# Altium PCB ICM20602.PcbDoc
Units mm, origin at the board's own origin, x right, y up, seen from the top; angles counter-clockwise.
Board outline 45.34 x 49.28 mm, 2 copper layers (Top Layer, Bottom Layer); 22 components, 13 nets, 98 pads, 36 vias.
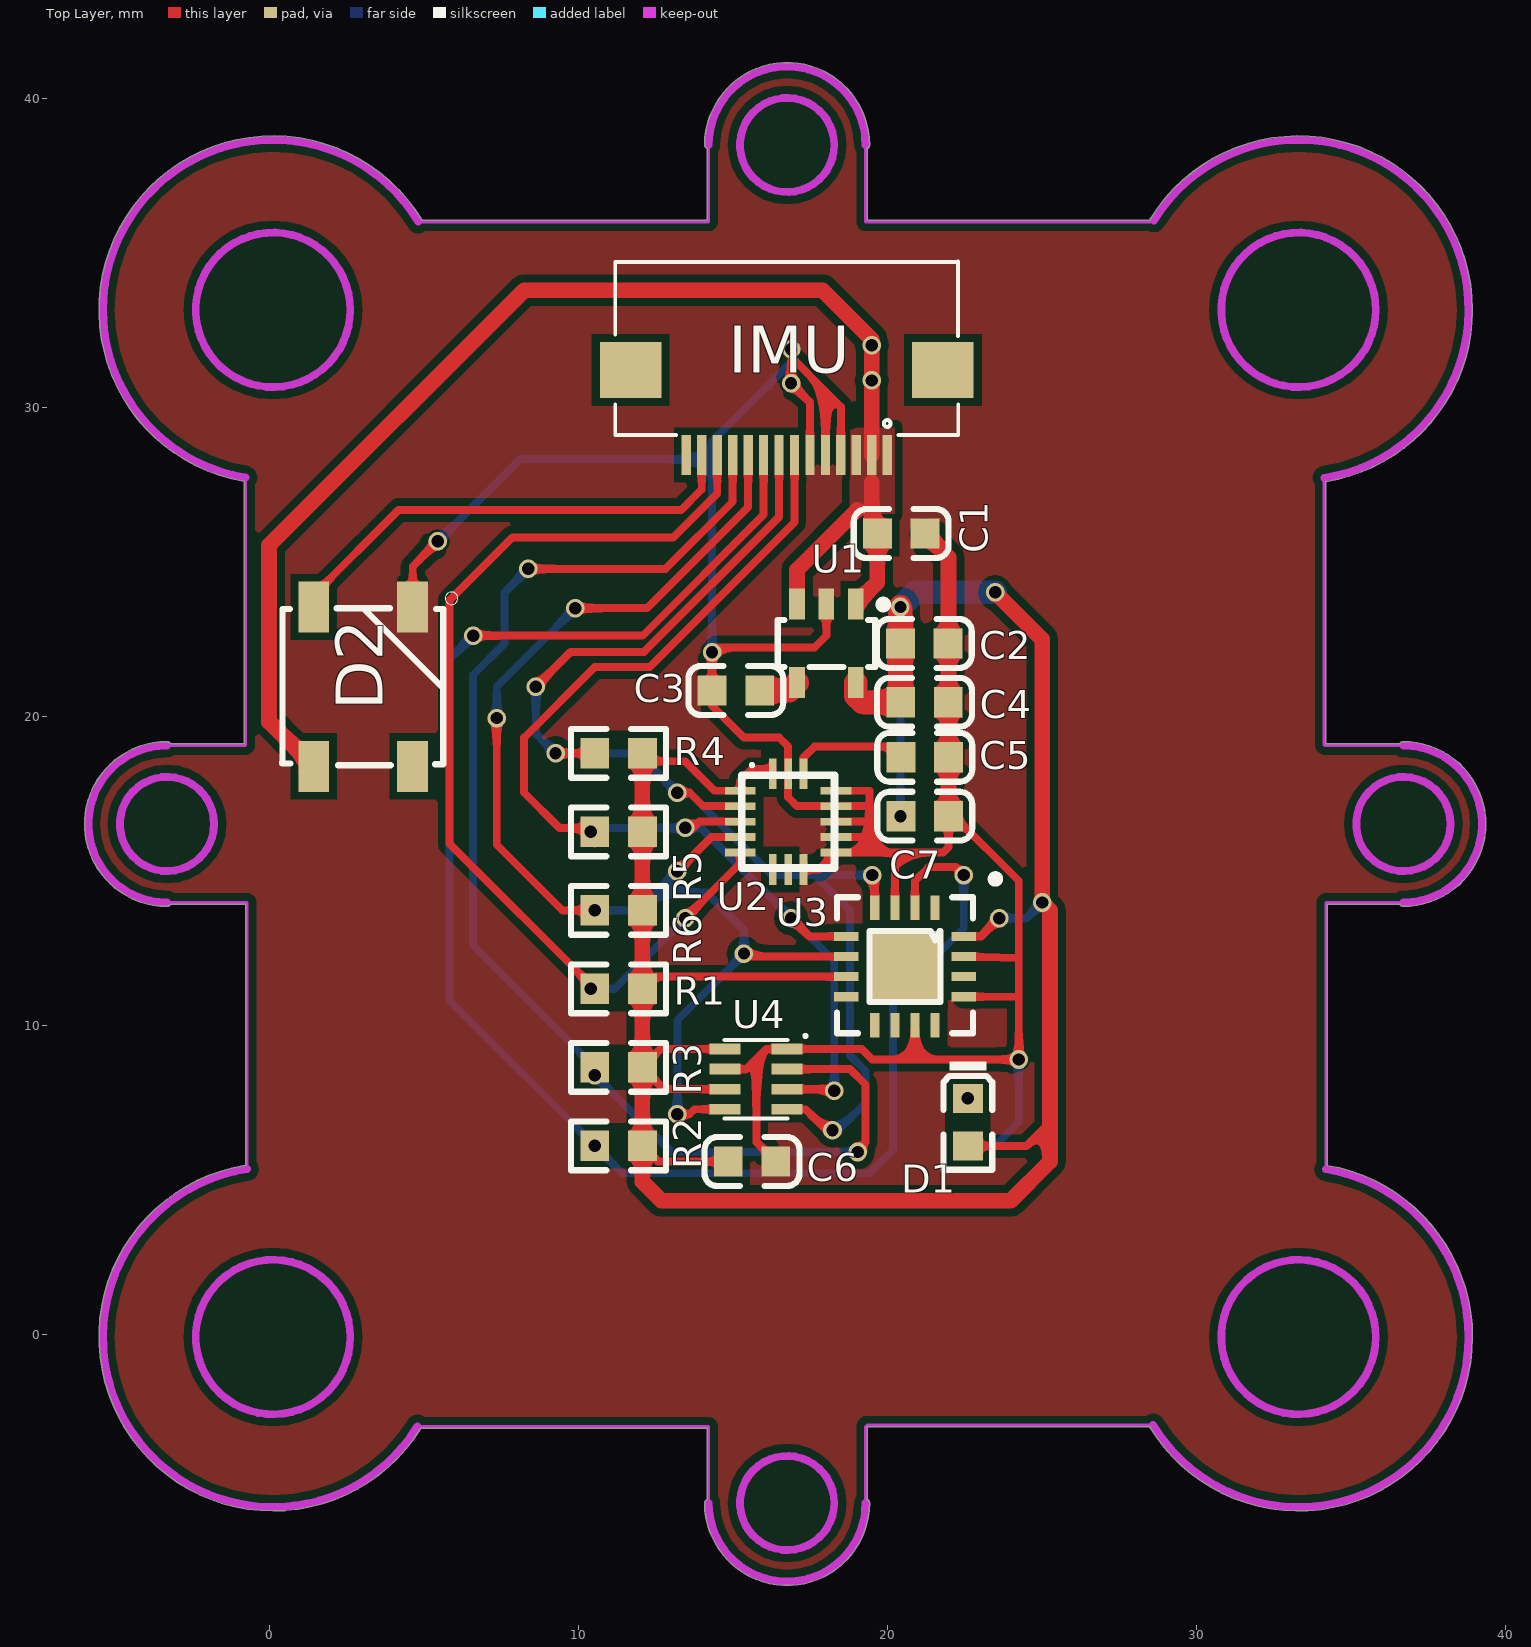
[diagram p0: Top Layer view]
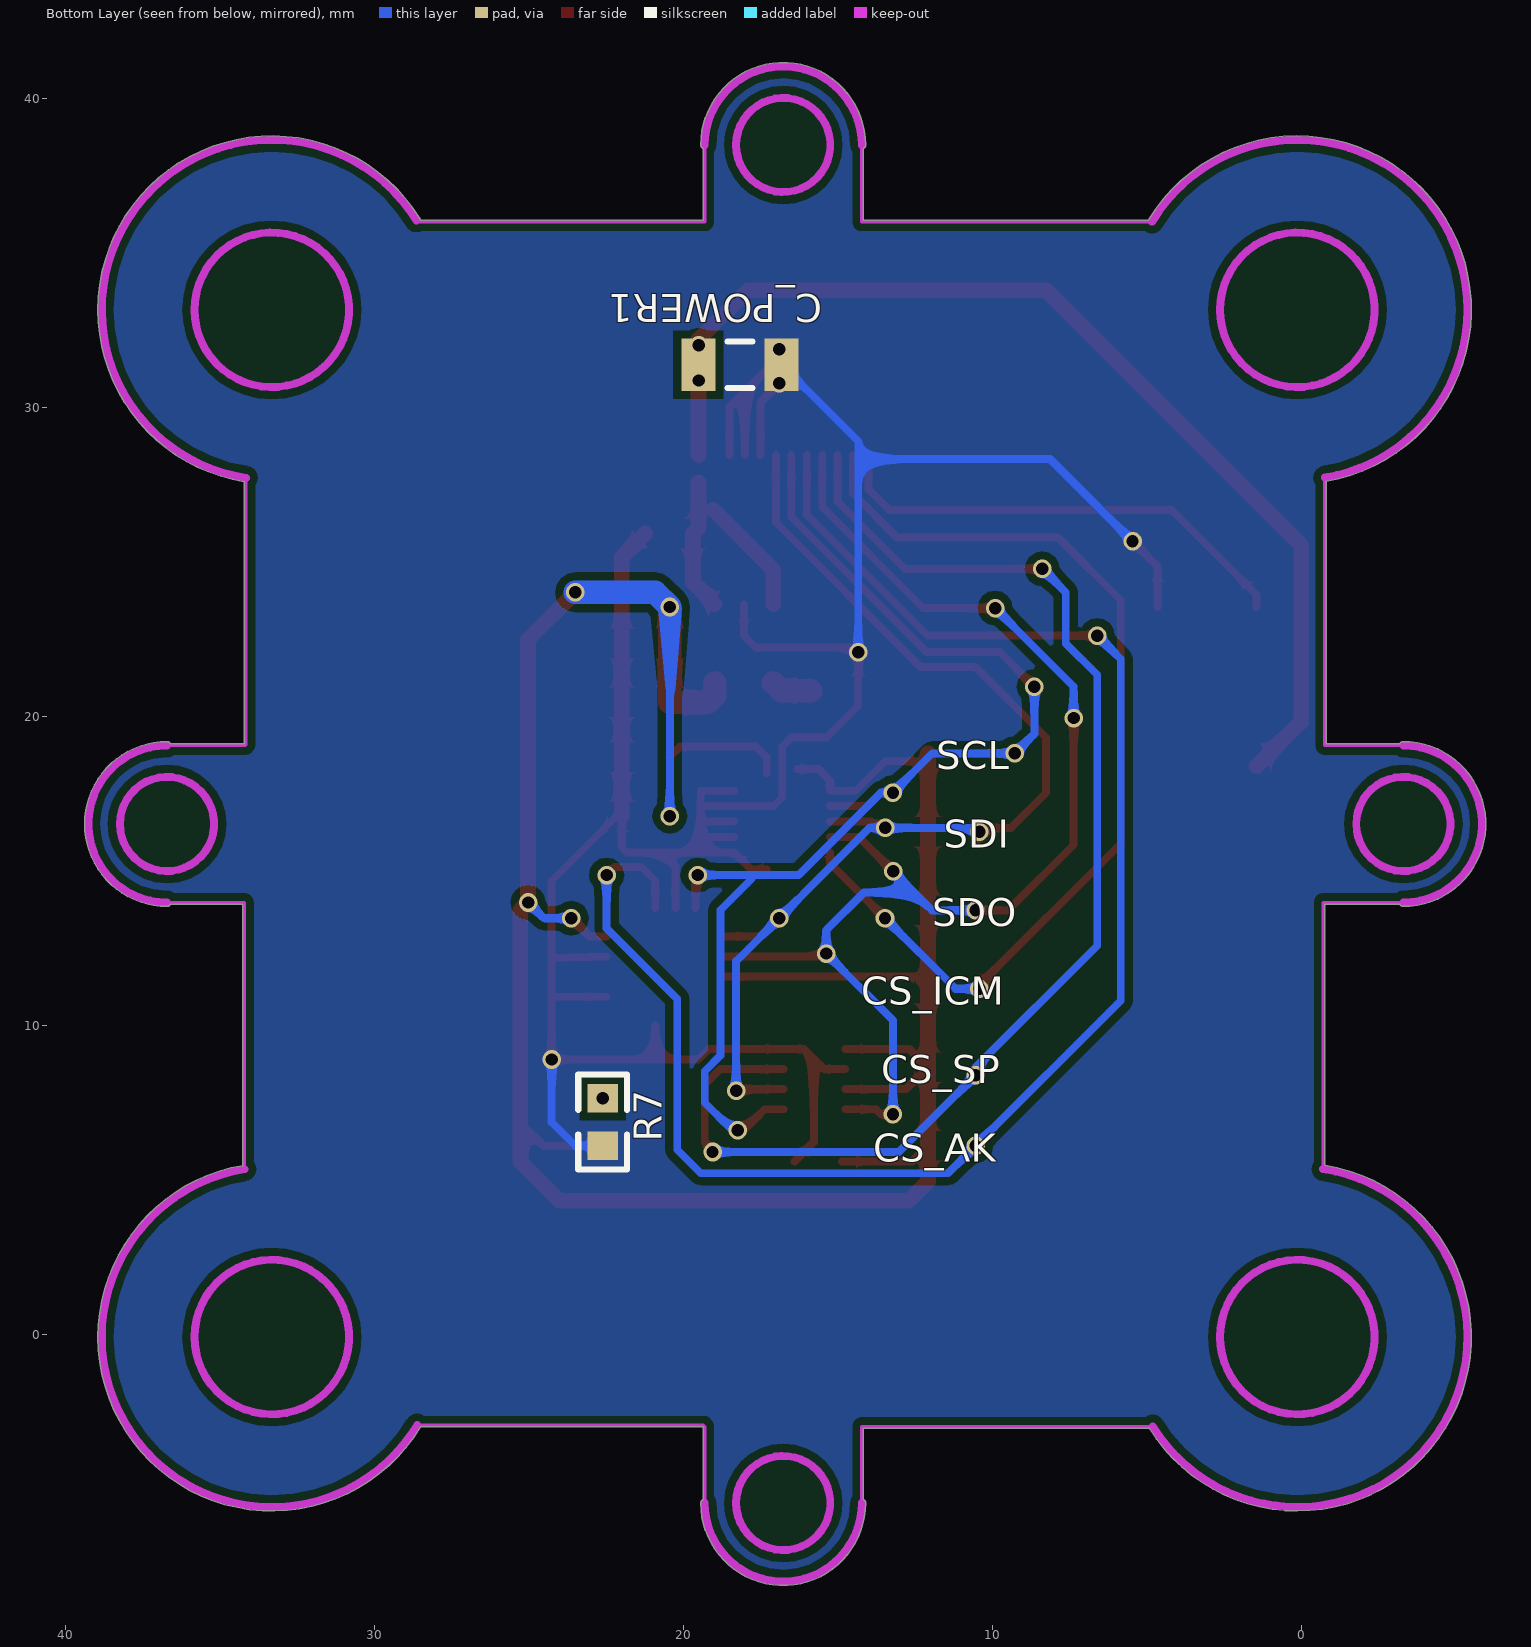
[diagram p1: Bottom Layer view, seen from below]
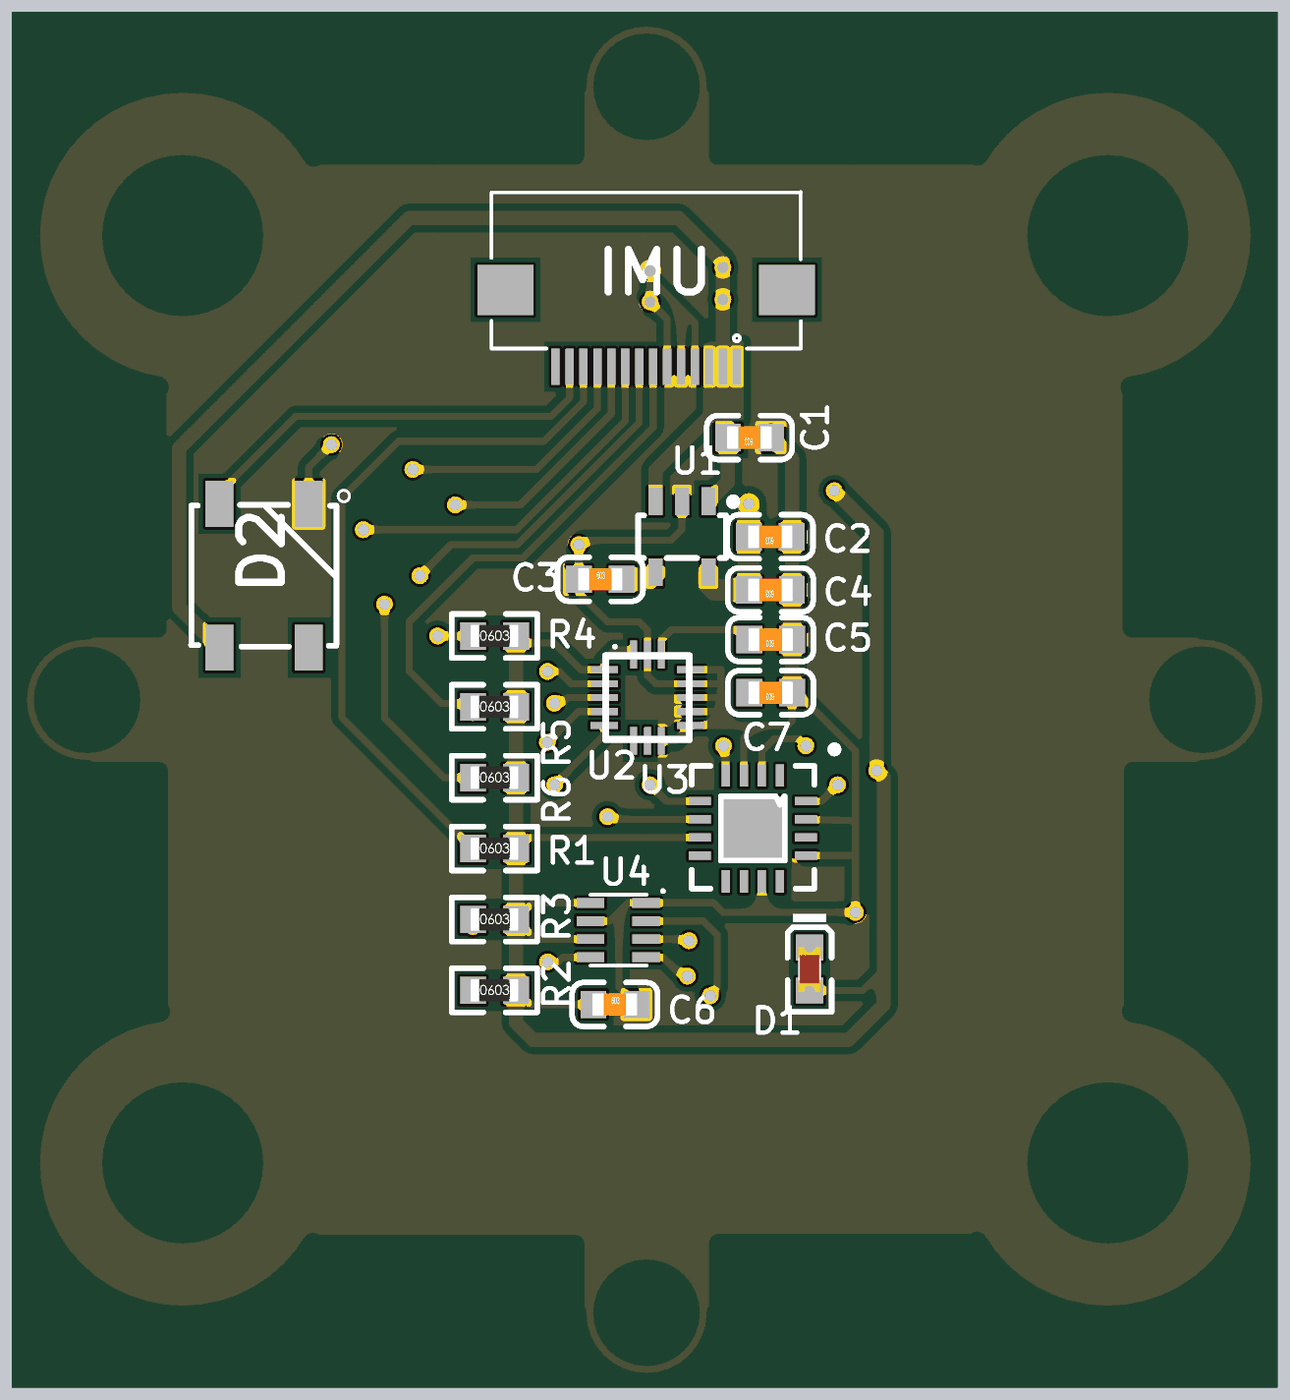
[diagram p2: 3D render of the assembled board from above, using the file's embedded part models]

## Layer stack, top to bottom
Top Solder: solder mask 0.0102, Solder Resist, Dk 3.5
Top Layer: signal copper 0.0356
Dielectric 1: dielectric 0.32, FR-4, Dk 4.8
Bottom Layer: signal copper 0.0356
Bottom Solder: solder mask 0.0102, Solder Resist, Dk 3.5

## Board outline
-0.759,5.467 ccw(c0.127,-0.09) 4.913,-3.05 ccw(c4.805,-2.983) 4.921,-3.034 14.173,-3.034 14.173,-5.344 ccw(c14.224,-5.461) 14.097,-5.461 ccw(c16.764,-5.461) 19.431,-5.461 ccw(c19.304,-5.461) 19.355,-5.344 19.355,-2.992 28.491,-2.992 ccw(c28.607,-2.941) 28.498,-3.007 ccw(c33.311,-0.09) 38.938,-0.09 ccw(c33.311,-0.09) 34.246,5.459 34.246,13.919 36.586,13.919 ccw(c36.703,13.97) 36.703,13.843 ccw(c36.703,16.51) 39.37,16.51 ccw(c36.703,16.51) 36.703,19.177 ccw(c36.703,19.05) 36.586,19.101 34.197,19.101 34.197,27.59 ccw(c33.311,33.147) 38.938,33.147 ccw(c33.311,33.147) 28.525,36.107 ccw(c28.633,36.04) 28.506,36.049 19.355,36.049 19.355,38.364 ccw(c19.304,38.481) 19.431,38.481 ccw(c16.764,38.481) 14.097,38.481 ccw(c14.224,38.481) 14.173,38.364 14.173,36.049 4.947,36.049 ccw(c4.831,35.998) 4.94,36.064 ccw(c0.127,33.147) -0.808,27.598 -0.808,19.101 -3.185,19.101 ccw(c-3.302,19.05) -3.302,19.177 ccw(c-3.302,16.51) -3.302,13.843 ccw(c-3.302,13.97) -3.185,13.919 -0.759,13.919

## Design rules (kind name [scope] priority, off if disabled: settings)
Clearance [All] p1: gap=0.254 ignorepadtopadclearanceinfootprint=TRUE
MinimumSolderMaskSliver [All] p1: minsoldermaskwidth=0
PolygonConnect [All] p1: connectstyle=Direct reliefconductorwidth=0.254 reliefentries=4 polygonreliefangle="90 Angle" airgapwidth=0.254
RoutingVias [All] p1: holewidth=0.4 width=0.6 viastyle="Through Hole" minholewidth=0.4 minwidth=0.6 maxholewidth=2.54 maxwidth=2.54
SilkToSilkClearance [All] p1: silktosilkclearance=0
SilkToSolderMaskClearance [IsPad] p1: minsilkscreentomaskgap=0 clearancetoexposedcopper=TRUE
SolderMaskExpansion [All] p1: expansion=0.102
UnRoutedNet [All] p1: checkbadconnections=TRUE
Width [All] p1: maxlimit=1.27 minlimit=0.152 preferedwidth=0.254
26 further rules are at their usual default settings.

## Classes and differential pairs
component class ICM20602: IMU

## Components (designator, comment, footprint, x,y, rotation, side; value= is the part's Value field where it differs from the comment)
C1 "100nF" 0603_C 20.455,25.908 r180 top
C2 "10uF" 0603_C 21.201,22.352 r180 top
C3 "100nF" 0603_C 15.105,20.828 r0 top
C4 "100nF" 0603_C 21.209,20.447 r180 top
C5 "100nF" 0603_C 21.217,18.669 r180 top
C6 "100nF" 0603_C 15.629,5.588 r0 top
C7 "100nF" 0603_C 21.217,16.764 r180 top
C_POWER1 "100uf" C1206 18.161,31.369 r180 bottom value=10uf
D1 "红灯 0603" 0603_LED_S1 22.614,6.858 r270 top
D2 "WS2812B" WS2812B 3.048,20.955 r270 top
IMU "FPC-0.5-14" FPC-0.5-14 16.752,28.448 r180 top
R1 "1KΩ" 0603_R 11.311,11.176 r0 top
R2 "1KΩ" 0603_R 11.311,6.096 r0 top
R3 "1KΩ" 0603_R 11.311,8.636 r0 top
R4 "1KΩ" 0603_R 11.311,18.796 r0 top
R5 "1KΩ" 0603_R 11.311,16.256 r0 top
R6 "1KΩ" 0603_R 11.311,13.716 r0 top
R7 "1KΩ" 0603_R 22.606,6.866 r90 bottom
U1 "XC6204-30" SOT23-5S 18.984,23.622 r270 top
U2 "ICM20602" ICM20602 15.248,15.113 r0 top
U3 "AK8975" AK8975 18.677,10.922 r0 top
U4 "SPL06" LGA-2_5X2MM 15.756,8.255 r0 top

## Footprints (in the part's own frame and the unit in brackets; to place one, negate y for a bottom-side part, rotate by r counter-clockwise, add the part's x,y. Pads: shape width x height; smd on the part's side, far side on the other; paste and mask are expansions set on the pad)
0603_C [mm]
  rect 0.93x0.98 smd: 1(-0.77,0) 2(0.77,0)
  silkscreen extent -1.53,-0.79 1.54,0.79, body extent -0.8,-0.4 0.8,0.4, height 0.3
0603_LED_S1 [mm]
  rect 0.93x0.98 smd: A(0.77,0) K(-0.77,0)
  silkscreen extent -1.98,-0.79 1.54,0.79, body extent -0.8,-0.4 0.8,0.4, height 0.6
0603_R [mm]
  rect 0.93x0.98 smd: 1(-0.77,0) 2(0.77,0)
  silkscreen extent -1.53,-0.79 1.54,0.79, body extent -0.85,-0.4 0.85,0.4, height 0.56
AK8975 [mil] "QFN, 16-Leads, Body 4.00x4.00mm, Pitch 0.65mm, Thermal Pad 2.60x2.60mm, IPC Medium Density"
  rect 11.81x31.5 smd: 1(113.19,113.19) 2(87.6,113.19) 3(62,113.19) 4(36.41,113.19) 9(36.41,-36.41) 10(62,-36.41) 11(87.6,-36.41) 12(113.19,-36.41)
  rect 31.5x11.81 smd: 5(0,76.78) 6(0,51.19) 7(0,25.59) 8(0,0) 13(149.6,0) 14(149.6,25.59) 15(149.6,51.19) 16(149.6,76.78)
  rect 90.55x90.55 smd: 17(74.8,38.39)
  silkscreen extent -12,-47 195,155, body extent -6,-41 156,120, height 30
C1206 [mm]
  rect 1.1x1.7 smd: 1(-1.35,0) 2(1.35,0)
  silkscreen extent -0.4,-0.75 0.4,0.75, body extent -1.7,-0.9 1.7,0.9, height 1.3
FPC-0.5-14 [mm]
  rect 0.3x1.3 smd: 1(-3.25,0) 2(-2.75,0) 3(-2.25,0) 4(-1.75,0) 5(-1.25,0) 6(-0.75,0) 7(-0.25,0) 8(0.25,0) 9(0.75,0) 10(1.25,0) 11(1.75,0) 12(2.25,0) 13(2.75,0) 14(3.25,0)
  rect 2x1.8 smd: Z1(-5.05,-2.75) Z2(5.05,-2.75)
  silkscreen extent -5.55,-6.26 5.55,-0.65
ICM20602 [mm]
  rect 1x0.25 smd: 1(-0.001,2.474) 2(-0.001,1.974) 3(-0.001,1.474) 4(-0.001,0.974) 5(-0.001,0.474) 9(3.099,0.474) 10(3.099,0.974) 11(3.099,1.474) 12(3.099,1.974) 13(3.099,2.474)
  rect 0.25x1 smd: 6(1.049,-0.076) 7(1.549,-0.076) 8(2.049,-0.076) 14(2.049,3.024) 15(1.549,3.024) 16(1.049,3.024)
  silkscreen extent 0.05,-0.03 3.05,3.35
LGA-2_5X2MM [mm]
  rect 1x0.35 smd: 1(1.001,0.975) 2(1.001,0.325) 3(1.001,-0.325) 4(1.001,-0.975) 5(-1.001,-0.975) 6(-1.001,-0.325) 7(-1.001,0.325) 8(-1.001,0.975)
  silkscreen extent -1.02,-1.27 1.65,1.45, body extent -1.09,-1.35 1.09,1.31, height 0.9
SOT23-5S [mm]
  rect 1x0.508 smd: 1(0,0) 2(0,-0.95) 3(0,-1.9) 4(2.54,-1.9) 5(2.54,0)
  silkscreen extent 0,-2.52 2.03,0.89
WS2812B [mm]
  rect 1.651x1 smd: 1(2.577,-1.6) 2(2.577,1.6) 3(-2.577,1.6) 4(-2.577,-1.6)
  silkscreen extent -3.06,-2.62 2.54,3.06

## Part data
C1 C3 C4 C5 C6 C7: library part "0603 100nF (104) 10% 50V", "贴片电容", Package=0603, SuppliersPartNumber=C14663, ComponentLink1Description=供应商, ComponentLink1URL=http://www.szlcsc.com/product/details_15331.html, Supplier=LC
C2: library part "0603 10uF (106) 10% 10V", "贴片电容", Package=0603, SuppliersPartNumber=C19702, ComponentLink1Description=供应商, ComponentLink1URL=http://www.szlcsc.com/product/details_20411.html, Supplier=LC
C_POWER1: library part "Cap Pol3", "Polarized Capacitor (Surface Mount)", LatestRevisionDate=17-Jul-2002, LatestRevisionNote="Re-released for DXP Platform.", PackageReference=C0805, Published=8-Jun-2000, Publisher="Altium Limited"
D1: library part "0603 红灯", "发光二极管", Package=0603, SuppliersPartNumber=C2286, ComponentLink1Description=供应商, ComponentLink1URL=http://www.szlcsc.com/product/details_2659.html, Supplier=LC
D2: "Intelligent Control Led Integrated Light Source Pack Of 10", Package=None, Availability=Unavailable, MF="Seeed Technology", MP=WS2812B, Price=None, SnapEDA_Link=https://www.snapeda.com/parts/WS2812B/Seeed%20Technology%20Co.%2C%20Ltd/view-part/?ref=snap
IMU: "FFC / FPC Board Connector, WR-FPC Series, Surface Mount, Receptacle, 14, Bottom, 0.5 mm", Package=None, Availability=Unavailable, MF="Wurth Electronics", MP=687114149022, Price=None, SnapEDA_Link=https://www.snapeda.com/parts/687114149022/Wurth%20Electronics%20Inc./view-part/?ref=snap
R1 R2 R3 R4 R5 R6 R7: library part "0603 1KΩ (1001) 1%", "贴片电阻", Package=0603, SuppliersPartNumber=C21190, ComponentLink1Description=供应商, ComponentLink1URL=http://www.szlcsc.com/product/details_21904.html, Supplier=LC
U1: library part XC6204

## Via types
v1: diameter 0.6, hole 0.4, Top Layer to Bottom Layer, 36 vias

## Nets (pads, with @x,y where several pads share a name; then routed paths per layer and width w, separated by ;. In a path a pad name is that pad's centre, name@x,y a point inside that pad or via, vN(x,y) a via of type N, cw(c..) or ccw(c..) an arc to the next point about the centre after c; other vN are vias at no path point)
3V3: C2.2 C4.2 C6.1 C7.2 D1.A R1.2 R2.2 R3.2 R4.2 R5.2 R6.2 U1.5 U2.1 U2.16 U3.7 U3.16 U4.6 U4.8 | length 89
  Top Layer w0.254: R2.2 12.589,5.588 C6.1 ; R1.2 12.477,11.572 U3.7 ; R4.2 12.335,18.542 13.462,18.542 14.417,17.587 U2.1 15.247,17.914 15.621,18.288 U2.16@16.297,18.288 ; U4.6 12.787,7.93 R3.2 12.675,9.23 U4.8 ; U3.16 23.032,12.872 v1(23.622,13.462) ; D1.A 24.503,6.088 25.273,6.858
  Top Layer w0.508: R4.2 R5.2 R6.2 R1.2 R3.2 R2.2 12.081,4.937 12.7,4.318 24.003,4.318 25.273,5.588 25.273,6.858 25.273,13.716 v1(25.019,13.97) 25.019,22.479 v1(23.495,24.003) v1@23.495,23.927
  Top Layer w0.762: U1.5 18.984,20.656 19.193,20.447 C4.2 20.431,20.455 C2.2 v1(20.431,23.532)
  Bottom Layer w0.254: v1(20.431,16.764) v1(20.431,23.532) ; v1(23.622,13.462) 24.511,13.462 v1(25.019,13.97)
  Bottom Layer w0.762: v1(20.431,23.532) 20.902,24.003 v1(23.495,24.003)
CS_AK: IMU.9 R2.1 U3.2 | length 54.6
  Top Layer w0.254: v1(6.604,22.606) 12.088,22.606 16.002,26.52 IMU.9 ; U3.2 20.902,14.671 21.344,15.113 22.225,15.113 v1(22.479,14.859)
  Bottom Layer w0.254: v1(6.604,22.606) 5.842,21.844 5.842,10.795 v1(10.541,6.096) 11.43,5.207 19.431,5.207 20.193,5.969 20.193,10.848 22.479,13.134 v1(22.479,14.859)
CS_ICM: IMU.12 R1.1 U2.5 | length 32.7
  Top Layer w0.254: R1.1 5.842,15.875 5.842,23.749 7.874,25.781 13.081,25.781 14.502,27.202 IMU.12 ; v1(13.47,13.462) 15.247,15.239 U2.5
  Bottom Layer w0.254: v1(10.414,11.176) 11.184,11.176 v1(13.47,13.462)
CS_SP: IMU.11 R3.1 U4.2 | length 42.5
  Top Layer w0.254: v1(8.382,24.765) 12.827,24.765 15.002,26.94 IMU.11 ; v1(10.541,8.382) R3.1 ; U4.2 18.796,8.58 19.304,8.072 19.304,6.223 v1@19.05,5.969
  Bottom Layer w0.254: v1(8.382,24.765) 7.62,24.003 7.62,22.352 6.604,21.336 6.604,12.573 10.541,8.636 v1(10.541,8.382) 13.025,5.898 v1(19.05,5.898)
GND: C1.1 C2.1 C3.1 C4.1 C5.1 C6.2 C7.1 C_POWER1.2 D2.3 IMU.4 IMU.5 IMU.6 R7.1 U1.2 U2.8 U2.9 U2.10 U2.11 U2.12 U2.13 U2.15 U3.3 U3.11 U3.13 U3.15 U4.1 U4.7 | length 99.4
  Top Layer w0.254: D2.3 4.648,24.841 v1(5.461,25.654) ; U4.7 15.446,8.58 15.771,8.905 ; C6.2 15.771,6.216 15.771,8.905 ; 16.891,31.496 v1(16.891,30.768) 17.502,30.157 IMU.6 ; 16.954,31.559 18.002,30.512 ; U2.8 17.797,15.037 U2.9 19.431,15.587 ; IMU.5 18.002,30.512 ; U1.2 18.034,22.606 17.653,22.225 14.487,22.225 v1(14.335,22.073) C3.1 14.335,20.336 15.367,19.304 16.51,19.304 16.797,19.017 U2.15 16.797,17.374 17.084,17.087 U2.12 19.304,17.087 ; U2.10 19.346,16.087 19.346,16.129 ; U2.11 19.304,16.587 ; U2.13 19.431,17.587 19.431,15.587 ; IMU.4 18.502,30.012 18.002,30.512 ; U3.3 20.252,15.13 20.709,15.587 ; U3.11 20.902,8.89 ; U3.13 24.257,10.922 ; U3.15 24.257,12.174 ; 15.771,8.905 16.096,9.23 U4.1 19.177,9.23 19.517,8.89 20.902,8.89 ; 19.431,15.587 20.709,15.587 ; 20.709,15.587 21.818,15.587 21.987,15.756 C7.1 22.163,16.764 24.257,14.67 24.257,10.922 ; 20.902,8.89 24.242,8.89 24.257,8.905 24.257,10.922
  Top Layer w0.508: C1.1 21.987,25.146 C5.1 C7.1
  Bottom Layer w0.254: v1(5.461,25.654) 8.128,28.321 14.335,28.321 ; v1(14.335,22.073) 14.335,28.321 ; C_POWER1.2 14.335,28.893 14.335,28.321 ; R7.1 23.495,6.096 24.257,6.858 v1(24.257,8.89)
  other v1: 16.891,31.877
NetC3_2: C3.2 U1.4 | length 1.3
  Top Layer w0.762: C3.2 16.83,20.828 U1.4
NetC5_2: C5.2 U2.14 | length 4
  Top Layer w0.254: U2.14 17.297,18.66 17.654,19.017 20.099,19.017 C5.2
NetD1_K: D1.K R7.2
  other v1: 22.606,7.636
RGB: D2.4 IMU.13 | length 15.5
  Top Layer w0.254: D2.4 1.448,23.927 4.191,26.67 13.335,26.67 14.002,27.337 IMU.13
SCL: IMU.8 R4.1 U2.2 U3.4 U4.4 | length 42.4
  Top Layer w0.254: v1(8.636,20.955) 9.754,22.073 12.129,22.073 16.502,26.445 IMU.8 ; v1@9.144,18.923 v1(9.271,18.796) R4.1 ; v1(13.212,17.526) 13.613,17.526 14.052,17.087 U2.2 ; U4.4 17.358,7.28 18.034,6.604 v1(18.232,6.604) ; U3.4 v1@19.602,14.696
  Bottom Layer w0.254: v1(8.636,20.955) 8.636,19.431 v1(9.271,18.796) 11.938,18.796 v1@13.212,17.522 ; v1(13.212,17.526) 13.597,17.526 16.264,14.859 17.78,14.859 ; v1(18.232,6.604) 18.415,6.604 19.304,7.493 19.304,8.509 18.796,9.017 18.796,13.724 17.78,14.74 17.78,14.859 ; v1@19.602,14.696 19.439,14.859 17.78,14.859
  other v1: 19.524,14.859
SDI: IMU.7 R5.1 U2.3 U3.5 U4.3 | length 38.1
  Top Layer w0.254: R5.1@10.541,15.875 R5.1 10.414,16.383 9.398,16.383 8.255,17.526 8.255,19.304 10.541,21.59 12.319,21.59 17.002,26.273 IMU.7 ; v1@13.502,16.383 13.724,16.383 13.928,16.587 U2.3 ; U4.3 18.232,7.93 v1(18.288,7.874) ; v1(16.891,13.462) 17.481,12.872 U3.5
  Bottom Layer w0.254: v1(10.414,16.256) 10.541,16.383 v1(13.462,16.383) 13.978,16.383 18.288,12.073 v1(18.288,7.874)
SDO: IMU.10 R6.1 U2.4 U3.6 U4.5 | length 42.2
  Top Layer w0.254: v1(7.366,19.939) 7.366,15.841 9.491,13.716 v1(10.541,13.716) ; v1(9.906,23.495) 12.232,23.495 15.502,26.765 IMU.10 ; v1(13.212,7.117) 13.602,7.117 13.765,7.28 U4.5 ; v1@13.212,14.982 14.317,16.087 U2.4 ; v1(15.367,12.319) 15.464,12.222 U3.6
  Bottom Layer w0.254: v1(7.366,19.939) 7.366,20.955 v1(9.906,23.495) ; v1(10.541,13.716) 11.946,13.716 12.525,14.295 ; v1(13.212,7.117) 13.212,10.156 15.367,12.311 v1(15.367,12.319) 15.367,13.081 14.153,14.295 12.525,14.295 ; v1@13.212,14.982 12.525,14.295
  other v1: 13.208,14.986
VCC: C1.2 C_POWER1.1 D2.1 IMU.1 IMU.2 IMU.3 U1.1 U1.3 | length 43.2
  Top Layer w0.508: D2.1 0.007,19.819 0,19.812 0,25.527 8.255,33.782 17.907,33.782 19.502,32.187 19.502,31.877 IMU.2 ; U1.3 17.084,24.731 19.023,26.67 ; U1.1 19.685,24.323 C1.2 19.502,26.091 19.502,27.559
  other v1: 19.502,30.861 19.502,32.004
pads on no net: D2.2 IMU.14 IMU.Z1 IMU.Z2 U2.6 U2.7 U3.1 U3.8 U3.9 U3.10 U3.12 U3.14 U3.17

## Polygon pours and split planes (outlines as drawn)
GND on Top Layer "GND_L01_P005" (solid, remove dead copper, pour order 5): -0.759,5.467 ccw(c0.127,-0.09) 4.913,-3.05 ccw(c4.805,-2.983) 4.921,-3.034 14.173,-3.034 14.173,-5.344 ccw(c14.224,-5.461) 14.097,-5.461 ccw(c16.764,-5.461) 19.431,-5.461 ccw(c19.304,-5.461) 19.355,-5.344 19.355,-2.992 28.491,-2.992 ccw(c28.607,-2.941) 28.498,-3.007 ccw(c33.311,-0.09) 38.938,-0.09 ccw(c33.311,-0.09) 34.246,5.459 34.246,13.919 36.586,13.919 ccw(c36.703,13.97) 36.703,13.843 ccw(c36.703,16.51) 39.37,16.51 ccw(c36.703,16.51) 36.703,19.177 ccw(c36.703,19.05) 36.586,19.101 34.197,19.101 34.197,27.59 ccw(c33.311,33.147) 38.938,33.147 ccw(c33.311,33.147) 28.525,36.107 ccw(c28.633,36.04) 28.506,36.049 19.355,36.049 19.355,38.364 ccw(c19.304,38.481) 19.431,38.481 ccw(c16.764,38.481) 14.097,38.481 ccw(c14.224,38.481) 14.173,38.364 14.173,36.049 4.947,36.049 ccw(c4.831,35.998) 4.94,36.064 ccw(c0.127,33.147) -0.808,27.598 -0.808,19.101 -3.185,19.101 ccw(c-3.302,19.05) -3.302,19.177 ccw(c-3.302,16.51) -3.302,13.843 ccw(c-3.302,13.97) -3.185,13.919 -0.759,13.919
VCC on Top Layer "VCC_L01_P000" (solid, remove dead copper, pour order 0): 18.796,29.337 20.252,29.337 20.252,26.543 18.796,26.543
GND on Bottom Layer "GND_L02_P006" (solid, remove dead copper, pour order 6): -0.759,5.467 ccw(c0.127,-0.09) 4.913,-3.05 ccw(c4.805,-2.983) 4.921,-3.034 14.173,-3.034 14.173,-5.344 ccw(c14.224,-5.461) 14.097,-5.461 ccw(c16.764,-5.461) 19.431,-5.461 ccw(c19.304,-5.461) 19.355,-5.344 19.355,-2.992 28.491,-2.992 ccw(c28.607,-2.941) 28.498,-3.007 ccw(c33.311,-0.09) 38.938,-0.09 ccw(c33.311,-0.09) 34.246,5.459 34.246,13.919 36.586,13.919 ccw(c36.703,13.97) 36.703,13.843 ccw(c36.703,16.51) 39.37,16.51 ccw(c36.703,16.51) 36.703,19.177 ccw(c36.703,19.05) 36.586,19.101 34.197,19.101 34.197,27.59 ccw(c33.311,33.147) 38.938,33.147 ccw(c33.311,33.147) 28.525,36.107 ccw(c28.633,36.04) 28.506,36.049 19.355,36.049 19.355,38.364 ccw(c19.304,38.481) 19.431,38.481 ccw(c16.764,38.481) 14.097,38.481 ccw(c14.224,38.481) 14.173,38.364 14.173,36.049 4.947,36.049 ccw(c4.831,35.998) 4.94,36.064 ccw(c0.127,33.147) -0.808,27.598 -0.808,19.101 -3.185,19.101 ccw(c-3.302,19.05) -3.302,19.177 ccw(c-3.302,16.51) -3.302,13.843 ccw(c-3.302,13.97) -3.185,13.919 -0.759,13.919

## Keep-outs
Keep-Out Layer:
  circle w0.254: c-3.302,16.51 r1.524
  circle w0.254: c16.764,-5.461 r1.524
  circle w0.254: c16.764,38.481 r1.524
  circle w0.254: c36.703,16.51 r1.524
  circle w0.254: c33.311,33.147 r2.5
  circle w0.254: c33.311,-0.09 r2.5
  circle w0.254: c0.127,-0.09 r2.5
  circle w0.254: c0.127,33.147 r2.5
  lines w0.102: -3.302,13.97 -0.707,13.97 -0.707,5.346 ; -3.302,19.05 -0.757,19.05 -0.757,27.718 ; 4.805,-2.983 14.224,-2.983 14.224,-5.461 ; 4.831,35.998 14.224,35.998 14.224,38.481 ; 19.304,-5.461 19.304,-2.983 ; 19.304,38.481 19.304,35.998 28.591,35.998 ; 19.346,-2.941 28.607,-2.941 ; 34.146,19.067 34.146,27.711 ; 34.163,19.05 36.703,19.05 ; 34.195,5.339 34.195,13.97 36.703,13.97
  lines w0.254: -3.302,13.97 cw(c-3.302,16.51) -3.302,19.05 ; -0.757,27.718 cw(c0.127,33.147) 4.831,35.998 ; -0.707,5.346 ccw(c0.127,-0.09) 4.805,-2.983 ; 14.224,-5.461 ccw(c16.764,-5.461) 19.304,-5.461 ; 14.224,38.481 cw(c16.764,38.481) 19.304,38.481 ; 28.607,-2.941 ccw(c33.311,-0.09) 34.195,5.339 ; 28.633,36.04 cw(c33.311,33.147) 34.146,27.711 ; 36.703,13.97 ccw(c36.703,16.51) 36.703,19.05

## Silkscreen, mask and mechanical layers (free items; w line width, h text height)
Bottom Overlay:
  text "SCL" at 11.819,18.288 h0.91
  text "SDI" at 11.565,15.748 h0.91
  text "SDO" at 11.946,13.208 h0.91
  text "CS_ICM" at 14.232,10.668 h0.91
  text "CS_SP" at 13.597,8.128 h0.91
  text "CS_AK" at 13.851,5.588 h0.91
Mechanical 15:
  lines w0.102: -5.715,16.528 39.243,16.51 ; 16.764,-7.747 16.764,38.735